# Altium PCB ZYNQ7020_AD9364_V2.PcbDoc (part 1 of 3)
Units mil, origin at the board's own origin, x right, y up, seen from the top; angles counter-clockwise.
Board outline 6000 x 4000 mil, 4 copper layers (Top Layer, Layer 1, Layer 2, Bottom Layer), stack 23.756 mil thick; 294 components, 275 nets, 1509 pads, 328 vias.
Unrouted connection lines stored in the file: 993.
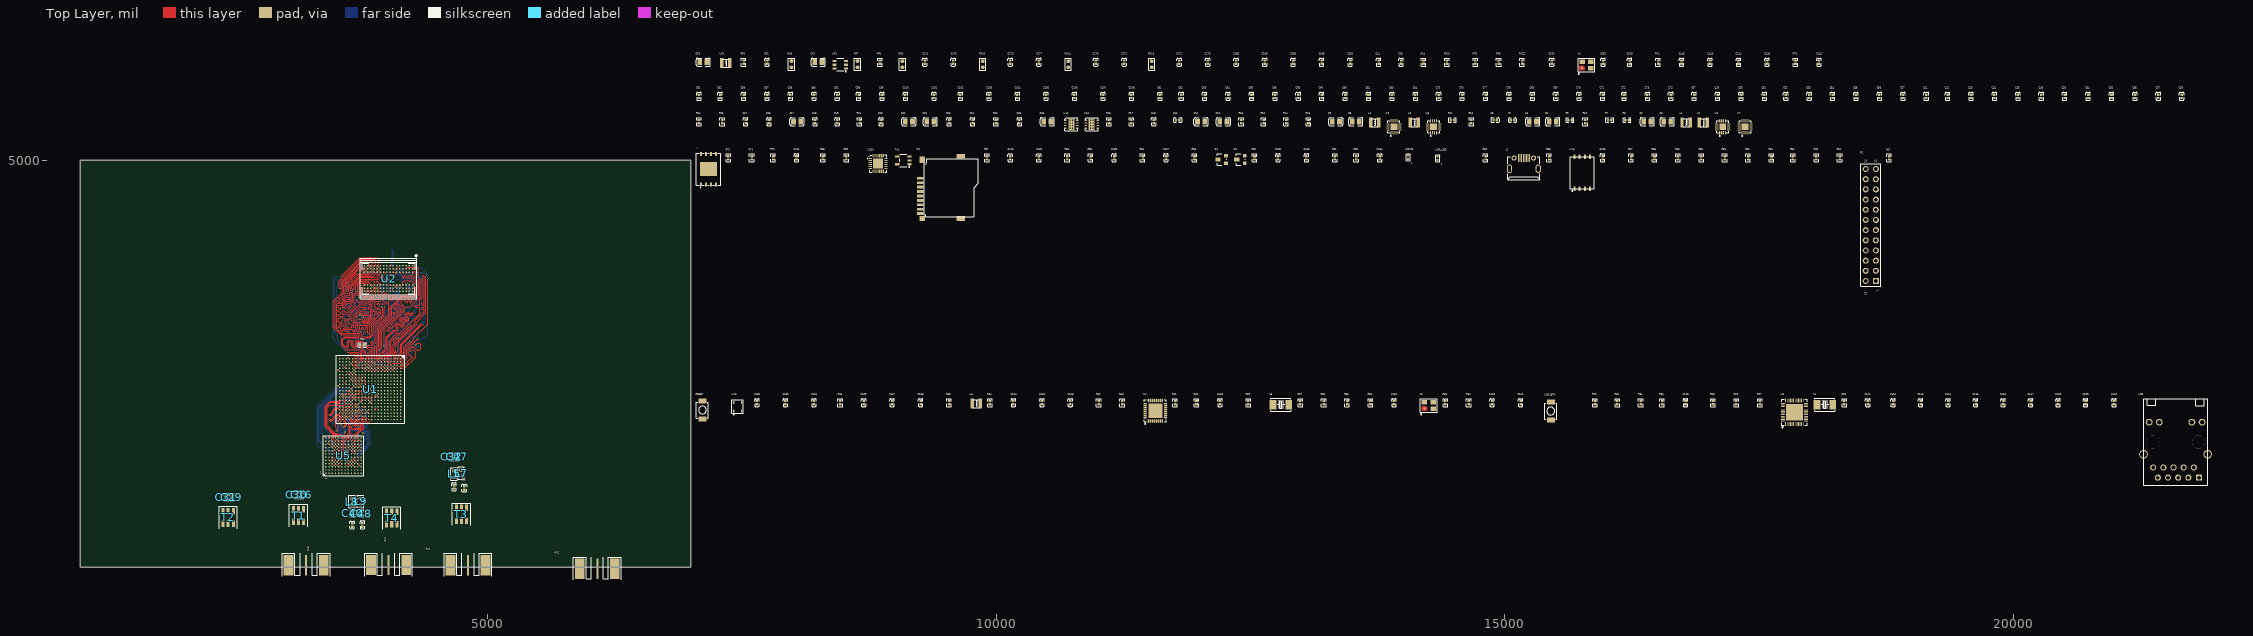
[diagram p0: Top Layer view]
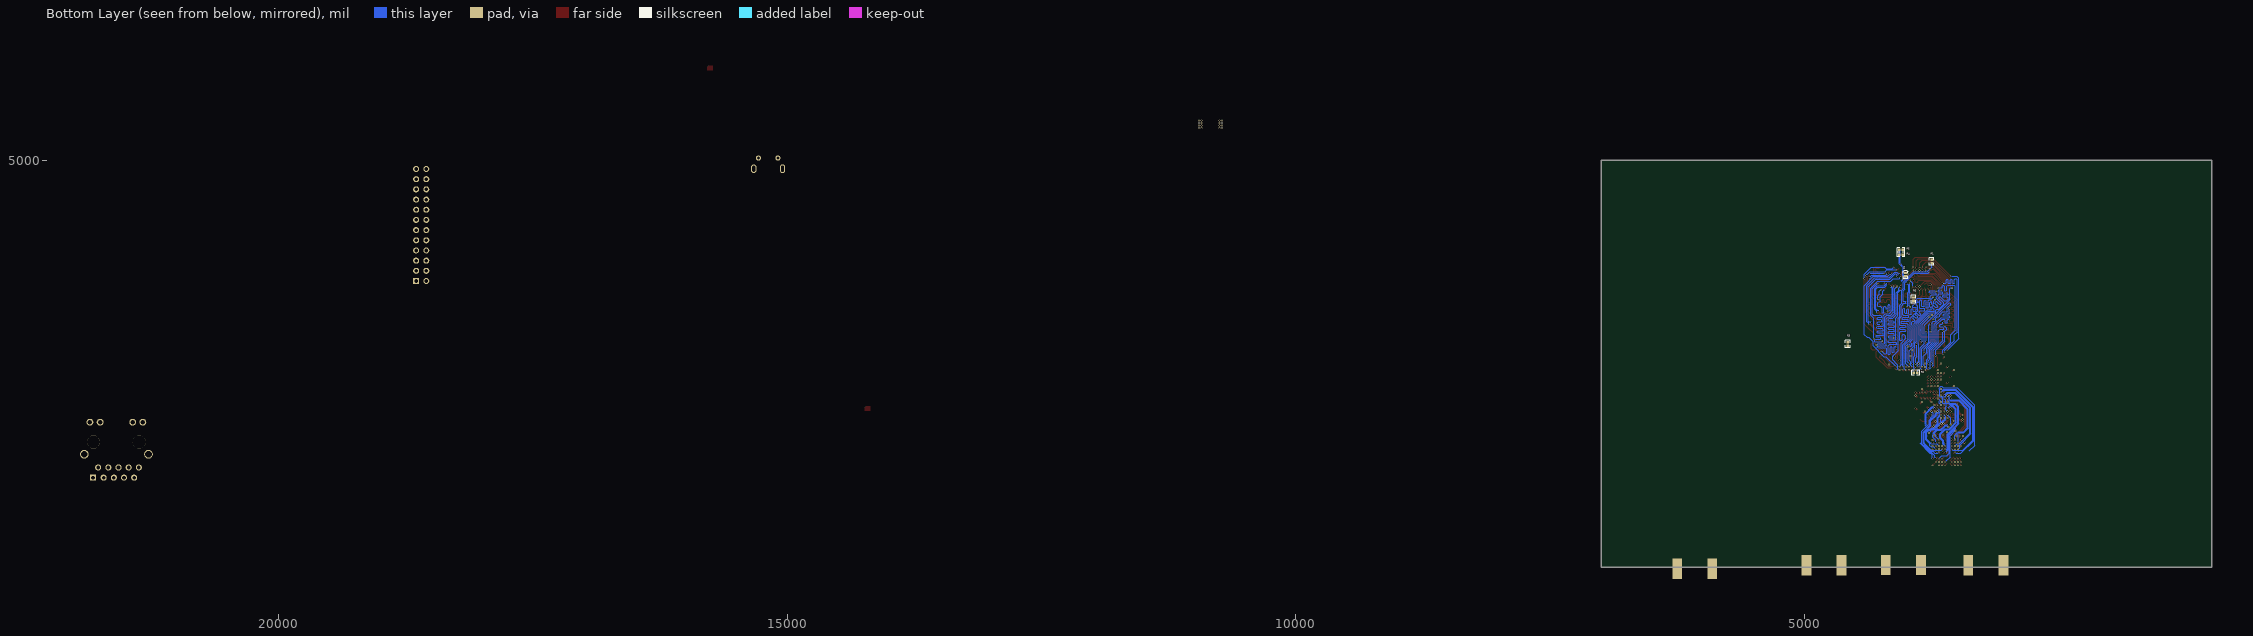
[diagram p1: Bottom Layer view, seen from below]
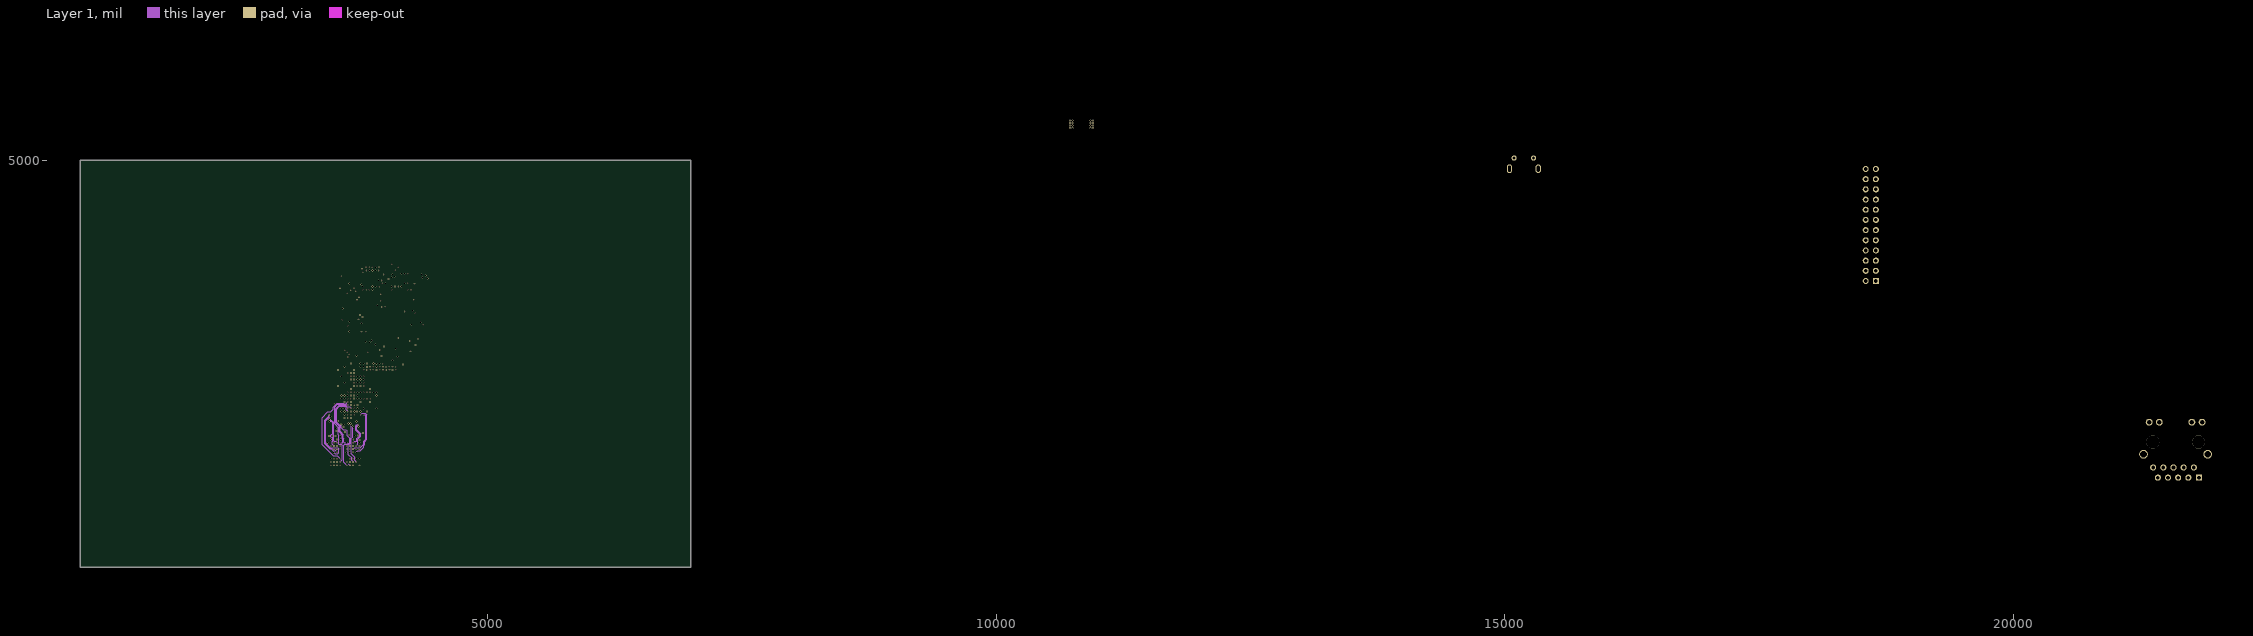
[diagram p2: Layer 1]

## Layer stack, top to bottom
Top Solder: solder mask 0.4, Solder Resist, Dk 3.5
Top Layer: signal copper 1.4
Dielectric 2: prepreg 2.8, PP-006, Dk 4.1
Layer 1: signal copper 1.378
Dielectric 1: dielectric 12.6, FR-4, Dk 4.8
Layer 2: signal copper 1.378
Dielectric 3: prepreg 2.8, PP-006, Dk 4.1
Bottom Layer: signal copper 1.4
Bottom Solder: solder mask 0.4, Solder Resist, Dk 3.5

## Board outline
1000,1000 7000,1000 7000,5000 1000,5000

## Design rules (kind name [scope] priority, off if disabled: settings)
Clearance [All] p1 off: gap=4 ignorepadtopadclearanceinfootprint=FALSE
Clearance Clearance_1 [All] p2: gap=4 ignorepadtopadclearanceinfootprint=FALSE
DiffPairsRouting [All] p1: maxlimit=100 minlimit=3 mostfreqgap=5 toplayer_minwidth=3 toplayer_maxwidth=100 toplayer_prefwidth=5 midlayer1_minwidth=3 midlayer1_maxwidth=100 midlayer1_prefwidth=5 midlayer2_minwidth=3 midlayer2_maxwidth=100 midlayer2_prefwidth=5 bottomlayer_minwidth=3 bottomlayer_maxwidth=100 bottomlayer_prefwidth=5 maxuncoupledlength=500
FabricationTestpoint [All] p1 off: side=3 testpointundercomponent=TRUE minsize=40 maxsize=100 preferedsize=60 minholesize=0 maxholesize=40 preferedholesize=32 testpointgrid=1 allowsidetop=TRUE allowsidebottom=TRUE usegrid=TRUE gridtolerance=0.01
PolygonConnect [All] p1: connectstyle=Relief reliefconductorwidth=30 reliefentries=4 polygonreliefangle="45 Angle" airgapwidth=10
RoutingLayers [All] p1: top layer_v5=TRUE mid layer 1_v5=FALSE mid layer 2_v5=FALSE bottom layer_v5=TRUE
RoutingVias [All] p1: holewidth=28 width=50 viastyle="Through Hole" minholewidth=1 minwidth=2 maxholewidth=500 maxwidth=500
SolderMaskExpansion [All] p1: expansion=4 istentingtop=FALSE
Width [All] p1: maxlimit=1000 minlimit=1 preferedwidth=10
27 further rules are at their usual default settings.

## Classes and differential pairs
net class DQ815: DDR3_DM1 DDR3_DQ8 DDR3_DQ9 DDR3_DQ10 DDR3_DQ11 DDR3_DQ12 DDR3_DQ13 DDR3_DQ14 DDR3_DQ15 DDR3_DQS1_N DDR3_DQS1_P
net class DQ07: DDR3_DM0 DDR3_DQ0 DDR3_DQ1 DDR3_DQ2 DDR3_DQ3 DDR3_DQ4 DDR3_DQ5 DDR3_DQ6 DDR3_DQ7 DDR3_DQS0_N DDR3_DQS0_P
net class ADDRES: DDR3_A0 DDR3_A1 DDR3_A2 DDR3_A3 DDR3_A4 DDR3_A5 DDR3_A6 DDR3_A7 DDR3_A8 DDR3_A9 DDR3_A10 DDR3_A11 DDR3_A12 DDR3_A13 DDR3_A14 DDR3_BA0 DDR3_BA1 DDR3_BA2 DDR3_CAS DDR3_CK_N DDR3_CK_P DDR3_CKE DDR3_CS DDR3_ODT DDR3_RAS DDR3_WE
component class "08 BALUN": C16 C29 C30 C31 C32 C40 C47 C48 C58 C59 C60 C63 L5 L7 L8 L9 RX1 RX2 T1 T2 T3 T4 TX1 TX2 U5
component class "07 AD9363": C14 C15 C142 C143 C144 C145 C146 C150 C151 C152 C162 C165 C166 C168 C169 C170 C171 C172 C173 C174 C175 C176 C177 CP1 CP2 CP3 LP1 R73 R74 R75 RP1 RP2 RX4 RX5 RX6 RX7 RX8 RX10 RX13 RX14 RX15 RX22 UP1 X4
component class "06 ZYNQ_POWER": C33 C34 C35 C36 C37 C38 C39 C41 C42 C43 C44 C45 C46 C49 C50 C51 C52 C53 C54 C55 C56 C57 C61 C62 C67 C68 C69 C70 C71 C72 C73 C74 C75 C76 C77 C78 C80 C81 C82 C83 C84 C85 C86 C87 C89 C90 C91 C92 C93 C94 C95 C96 C98 C99 C100 C101 C102 C103 C104 C105 C106 C107 C108
component class "05 POWER-SUPPLY": C2 C3 C4 C5 C6 C7 C8 C9 C10 C11 C12 C13 C17 C18 C19 C20 C21 C22 C23 C24 C25 C26 C27 C28 L1 L2 L3 L4 R7 R8 R9 R10 R11 R12 R13 R14 R15 R16 R17 R18 R21 R22 R24 R25 U6 U7 U8 U9 U11 U12
component class "04 ZYNQ_BANK0": * C133 C134 C135 C136 C137 C138 C139 C140 C141 DONE J2 P2 Q1 Q2 R47 R48 R49 R50 R51 R52 R53 R54 R55 R56 R57 R58 R59 R60 R61 R62 R63 R64 R65 R66 R67 R68 R69 R70 R71 R72 tf1 TU1 U14 USD1 USR_LED
component class "03 ZYNQ_PL-BANK34-35": U1
component class "02 ZYNQ_PS-BANK500-501": C109 C110 C111 C112 C113 C114 C115 C116 C117 C118 C119 C120 C121 C122 C123 C124 C125 C126 C127 C128 C129 C130 C131 C132 L6 LG1 R19 R26 R27 R28 R29 R30 R31 R32 R33 R34 R35 R36 R37 R38 R39 R40 R41 R42 R43 R44 R45 R46 RESET U3 U4 U13 USR_BTN X1 X2 X3
component class "01 ZYNQ_DDR": C1 R1 R2 R3 R4 R5 R6 R20 U2
differential pair USB_OTG: +USB_OTG_P -USB_OTG_N
differential pair TX_FRAME: +TX_FRAME_P -TX_FRAME_N
differential pair TX_D5: +TX_D5_P -TX_D5_N
differential pair TX_D4: +TX_D4_P -TX_D4_N
differential pair TX_D3: +TX_D3_P -TX_D3_N
differential pair TX_D2: +TX_D2_P -TX_D2_N
differential pair TX_D1: +TX_D1_P -TX_D1_N
differential pair TX_D0: +TX_D0_P -TX_D0_N
differential pair TX1B: +TX1B_P -TX1B_N
differential pair TX1BN: +TX1BN_P -TX1BN_N
differential pair TX1A: +TX1A_P -TX1A_N
differential pair RX_FRAME: +RX_FRAME_P -RX_FRAME_N
differential pair RX_D5: +RX_D5_P -RX_D5_N
differential pair RX_D4: +RX_D4_P -RX_D4_N
differential pair RX_D3: +RX_D3_P -RX_D3_N
differential pair RX_D2: +RX_D2_P -RX_D2_N
differential pair RX_D1: +RX_D1_P -RX_D1_N
differential pair RX_D0: +RX_D0_P -RX_D0_N
differential pair RX1B: +RX1B_P -RX1B_N
differential pair RX1BN: +RX1BN_P -RX1BN_N
differential pair RX1A: +RX1A_P -RX1A_N
differential pair RX1AN: +RX1AN_P -RX1AN_N
differential pair PHY_MDI3: +PHY_MDI3_P -PHY_MDI3_N
differential pair PHY_MDI2: +PHY_MDI2_P -PHY_MDI2_N
differential pair PHY_MDI1: +PHY_MDI1_P -PHY_MDI1_N
differential pair PHY_MDI0: +PHY_MDI0_P -PHY_MDI0_N
differential pair FB_CLK: +FB_CLK_P -FB_CLK_N
differential pair DDR3_DQS1: +DDR3_DQS1_P -DDR3_DQS1_N
differential pair DDR3_DQS0: +DDR3_DQS0_P -DDR3_DQS0_N
differential pair DDR3_CK: +DDR3_CK_P -DDR3_CK_N
differential pair DATA_CLK: +DATA_CLK_P -DATA_CLK_N

## Components (designator, comment, footprint, x,y, rotation, side; value= is the part's Value field where it differs from the comment)
* "W25Q128" W25Q256 7175,4915 r0 top
C1 "104" LC-0402_C 4011,3877 r90 bottom
C2 "10μF" LC-0805_C 16400,5380 r0 top
C3 "10μF" LC-0805_C 16595,5380 r0 top
C4 "10μF" LC-0805_C 15275,5380 r0 top
C5 "10μF" LC-0805_C 15470,5380 r0 top
C6 "0.1μF" LC-0402_C 14905,5395 r0 top
C7 "0.1μF" LC-0402_C 15075,5395 r0 top
C8 "10μF" LC-0805_C 13535,5380 r0 top
C9 "10μF" LC-0805_C 13340,5380 r0 top
C10 "10μF" LC-0805_C 12235,5380 r0 top
C11 "0.1μF" LC-0402_C 11785,5395 r0 top
C12 "10μF" LC-0805_C 12015,5380 r0 top
C13 "0.1μF" LC-0402_C 11550,5380 r90 top
C14 "1μ" LC-0402_C 13760,5965 r90 top
C15 "0.001μ" LC-0402_C 13980,5965 r90 top
C16 "18p" LC-0402_C 3177,1712.94 r90 top
C17 "2.2μF" LC-0805_C 8045,5380 r0 top
C18 "0.1μF" LC-0402_C 8220,5380 r90 top
C19 "3.3nF" LC-0402_C 8440,5380 r90 top
C20 "2.2μF" LC-0402_C 8870,5380 r90 top
C21 "0.1μF" LC-0805_C 9145,5380 r0 top
C22 "2.2μF" LC-0805_C 9355,5380 r0 top
C23 "0.1μF" LC-0402_C 9540,5380 r90 top
C24 "3.3nF" LC-0402_C 9770,5380 r90 top
C25 "2.2μF" LC-0402_C 10230,5380 r90 top
C26 "0.1μF" LC-0805_C 10505,5380 r0 top
C27 "0.1μF" LC-0402_C 7540,5380 r90 top
C28 "0.1μF" LC-0402_C 7770,5380 r90 top
C29 "18p" LC-0402_C 2493,1688 r90 top
C30 "18p" LC-0402_C 3131,1713.47 r90 top
C31 "18p" LC-0402_C 2438,1689 r90 top
C32 "18p" LC-0402_C 4653,2087 r270 top
C33 "10μF" LC-0402_C 20500,5630 r90 top
C34 "10μF" LC-0402_C 20730,5630 r90 top
C35 "10μF" LC-0402_C 20960,5630 r90 top
C36 "10μF" LC-0402_C 21190,5630 r90 top
C37 "10μF" LC-0402_C 21420,5630 r90 top
C38 "10μF" LC-0402_C 7980,5630 r90 top
C39 "10μF" LC-0402_C 21650,5630 r90 top
C40 "18p" LC-0402_C 3678,1531 r270 top
C41 "10μF" LC-0402_C 19140,5630 r90 top
C42 "10μF" LC-0402_C 19350,5630 r90 top
C43 "10μF" LC-0402_C 19580,5630 r90 top
C44 "10μF" LC-0402_C 19810,5630 r90 top
C45 "10μF" LC-0402_C 20040,5630 r90 top
C46 "10μF" LC-0402_C 20270,5630 r90 top
C47 "18p" LC-0402_C 4707,2089 r270 top
C48 "18p" LC-0402_C 3764,1530 r270 top
C49 "10μF" LC-0402_C 17090,5630 r90 top
C50 "10μF" LC-0402_C 17320,5630 r90 top
C51 "10μF" LC-0402_C 17550,5630 r90 top
C52 "10μF" LC-0402_C 17760,5630 r90 top
C53 "10μF" LC-0402_C 17990,5630 r90 top
C54 "10μF" LC-0402_C 18220,5630 r90 top
C55 "10μF" LC-0402_C 18450,5630 r90 top
C56 "10μF" LC-0402_C 18680,5630 r90 top
C57 "10μF" LC-0402_C 18910,5630 r90 top
C58 "10μ" LC-0402_C 4675,1792.73 r90 top
C59 "0.001μ" LC-0402_C 4775,1780.73 r270 top
C60 "10μ" LC-0402_C 3674,1417.73 r270 top
C61 "10μF" LC-0402_C 7080,5630 r90 top
C62 "10μF" LC-0402_C 7290,5630 r90 top
C63 "0.001μ" LC-0402_C 3775,1418.73 r90 top
C67 "10μF" LC-0402_C 16860,5630 r90 top
C68 "10μF" LC-0402_C 15270,5630 r90 top
C69 "10μF" LC-0402_C 15500,5630 r90 top
C70 "10μF" LC-0402_C 15730,5630 r90 top
C71 "10μF" LC-0402_C 15960,5630 r90 top
C72 "10μF" LC-0402_C 16170,5630 r90 top
C73 "10μF" LC-0402_C 16400,5630 r90 top
C74 "10μF" LC-0402_C 16630,5630 r90 top
C75 "10μF" LC-0402_C 14350,5630 r90 top
C76 "10μF" LC-0402_C 14580,5630 r90 top
C77 "10μF" LC-0402_C 14810,5630 r90 top
C78 "10μF" LC-0402_C 15040,5630 r90 top
C80 "10μF" LC-0402_C 13430,5630 r90 top
C81 "10μF" LC-0402_C 8440,5630 r90 top
C82 "10μF" LC-0402_C 13660,5630 r90 top
C83 "10μF" LC-0402_C 13890,5630 r90 top
C84 "10μF" LC-0402_C 14120,5630 r90 top
C85 "10μF" LC-0402_C 12970,5630 r90 top
C86 "10μF" LC-0402_C 8210,5630 r90 top
C87 "10μF" LC-0402_C 7750,5630 r90 top
C89 "10μF" LC-0402_C 7520,5630 r90 top
C90 "10μF" LC-0402_C 13200,5630 r90 top
C91 "10μF" LC-0402_C 11610,5630 r90 top
C92 "10μF" LC-0402_C 11820,5630 r90 top
C93 "10μF" LC-0402_C 12050,5630 r90 top
C94 "10μF" LC-0402_C 12280,5630 r90 top
C95 "10μF" LC-0402_C 12510,5630 r90 top
C96 "10μF" LC-0402_C 12740,5630 r90 top
C98 "10μF" LC-0402_C 8650,5630 r90 top
C99 "10μF" LC-0402_C 8880,5630 r90 top
C100 "10μF" LC-0402_C 9110,5630 r90 top
C101 "10μF" LC-0402_C 9390,5630 r90 top
C102 "10μF" LC-0402_C 9650,5630 r90 top
C103 "10μF" LC-0402_C 9930,5630 r90 top
C104 "10μF" LC-0402_C 10210,5630 r90 top
C105 "10μF" LC-0402_C 10490,5630 r90 top
C106 "10μF" LC-0402_C 10770,5630 r90 top
C107 "10μF" LC-0402_C 11050,5630 r90 top
C108 "10μF" LC-0402_C 11330,5630 r90 top
C109 "1μ" LC-0402_C 20705,2620 r90 top
C110 "1μ" LC-0402_C 20985,2620 r90 top
C111 "1μ" LC-0402_C 18565,2620 r90 top
C112 "0.1μ" LC-0402_C 18815,2620 r90 top
C113 "1μ" LC-0402_C 19085,2620 r90 top
C114 "1μ" LC-0402_C 19355,2620 r90 top
C115 "1μ" LC-0402_C 19625,2620 r90 top
C116 "1μ" LC-0402_C 19895,2620 r90 top
C117 "18p" LC-0402_C 20165,2620 r90 top
C118 "18p" LC-0402_C 20435,2620 r90 top
C119 "0.01μ" LC-0402_C 16775,2620 r90 top
C120 "0.1μ" LC-0402_C 14875,2620 r90 top
C121 "10μ" LC-0402_C 15155,2620 r90 top
C122 "18p" LC-0402_C 13910,2620 r90 top
C123 "18p" LC-0402_C 12200,2620 r90 top
C124 "1μ" LC-0402_C 10170,2620 r90 top
C125 "1μ" LC-0402_C 10450,2620 r90 top
C126 "1μ" LC-0402_C 10730,2620 r90 top
C127 "1μ" LC-0402_C 8980,2620 r90 top
C128 "1μ" LC-0402_C 9260,2620 r90 top
C129 "4.7μ" LC-0402_C 8700,2620 r90 top
C130 "1μ" LC-0402_C 7930,2620 r90 top
C131 "1μ" LC-0402_C 8210,2620 r90 top
C132 "0.1μ" LC-0402_C 7650,2620 r90 top
C133 "0.1μ" LC-0402_C 15960,5025 r90 top
C134 "0.1μ" LC-0402_C 13770,5025 r90 top
C135 "4.7μ" LC-0402_C 12770,5025 r90 top
C136 "4.7μ" LC-0402_C 13050,5025 r90 top
C137 "4.7μ" LC-0402_C 11670,5025 r90 top
C138 "0.1μ" LC-0402_C 11160,5025 r90 top
C139 "10μ" LC-0402_C 10420,5025 r90 top
C140 "0.1μ" LC-0402_C 10140,5025 r90 top
C141 "0.1μ" LC-0402_C 8040,5025 r90 top
C142 "1μ" LC-0402_C 18085,5965 r90 top
C143 "0.1μ" LC-0402_C 17015,5965 r90 top
C144 "10μ" LC-0402_C 17295,5965 r90 top
C145 "1μ" LC-0402_C 17575,5965 r90 top
C146 "0.001μ" LC-0402_C 16735,5965 r90 top
C150 "18p" LC-0402_C 16225,5965 r90 top
C151 "0.001μ" LC-0402_C 15965,5965 r90 top
C152 "18p" LC-0402_C 15460,5965 r90 top
C162 "10μ" LC-0402_C 13480,5965 r90 top
C165 "10μ" LC-0402_C 12920,5965 r90 top
C166 "1μ" LC-0402_C 13200,5965 r90 top
C168 "1μ" LC-0402_C 12360,5965 r90 top
C169 "0.001μ" LC-0402_C 12640,5965 r90 top
C170 "1μ" LC-0402_C 10980,5965 r90 top
C171 "0.001μ" LC-0402_C 11260,5965 r90 top
C172 "1μ" LC-0402_C 11800,5965 r90 top
C173 "0.001μ" LC-0402_C 12080,5965 r90 top
C174 "1μ" LC-0402_C 9300,5965 r90 top
C175 "0.001μ" LC-0402_C 9580,5965 r90 top
C176 "1μ" LC-0402_C 10140,5965 r90 top
C177 "0.001μ" LC-0402_C 10420,5965 r90 top
CP1 "22uF" LC-0805_C 8255,5965 r0 top
CP2 "22pF" LC-0402_C 7750,5965 r90 top
CP3 "22uF" LC-0805_C 7125,5965 r0 top
DONE "LED" D0402 14050,5030 r90 top
J2 "microusb" "micro usb" 15090,5020 r0 top
L1 "2.2uH" L1008 16780,5370 r0 top
L2 "2.2uH" L1008 16950,5370 r0 top
L3 "2.2uH" L1008 14110,5370 r0 top
L4 "2.2uH" L1008 13720,5370 r0 top
L5 "330nh" LC-0603_L 4676,1919 r270 top
L6 "2.2uH" L1008 9805,2610 r0 top
L7 "330nh" LC-0603_L 4745,1928 r270 top
L8 "330nh" LC-0603_L 3672,1647 r90 top
L9 "330nh" LC-0603_L 3757,1649 r90 top
LG1 "HR911130C" HR911130C 21590,2155 r0 top
LP1 "4.7uH" L1008 7345,5955 r0 top
P2 "Header 12X2A" HDR2X12_CEN 18645,3815 r90 top
Q1 "AO3400" NMOS 12180,5010 r0 top
Q2 "AO3400" NMOS 12365,5010 r0 top
R1 "4.7K" LC-0402_R 3754,4007.27 r90 bottom
R2 "82R" LC-0402_R 3911.73,2913 r0 bottom
R3 "82R" LC-0402_R 4579,3196 r90 bottom
R4 "4.7K" LC-0402_R 4054.73,4074 r180 bottom
R5 "4.7K" LC-0402_R 4055,4120 r0 bottom
R6 "240R" LC-0402_R 3932.68,3635.86 r90 bottom
R7 "100K" LC-0402_R 16030,5395 r0 top
R8 "10K" LC-0402_R 16200,5395 r0 top
R9 "4.99K" LC-0402_R 15640,5395 r0 top
R10 "18.7K" LC-0402_R 15790,5380 r90 top
R11 "20K" LC-0402_R 14485,5395 r0 top
R12 "15K" LC-0402_R 14670,5380 r90 top
R13 "10K" LC-0402_R 13070,5380 r90 top
R14 "13K" LC-0402_R 12850,5380 r90 top
R15 "10K" LC-0402_R 12630,5380 r90 top
R16 "56.2K" LC-0402_R 12410,5380 r90 top
R17 "15K" LC-0402_R 11330,5380 r90 top
R18 "18K" LC-0402_R 11110,5380 r90 top
R19 "10K" LC-0402_R 15885,2620 r90 top
R20 "80.6R" LC-0402_R 3772,3186 r180 top
R21 "6.25K" LC-0402_R 8660,5380 r90 top
R22 "6.25K" LC-0402_R 10000,5380 r90 top
R24 "10K" LC-0402_R 7080,5380 r90 top
R25 "10K" LC-0402_R 7310,5380 r90 top
R26 "2.49K" LC-0402_R 18335,2620 r90 top
R27 "4.7K" LC-0402_R 17505,2620 r90 top
R28 "33R" LC-0402_R 17045,2620 r90 top
R29 "33R" LC-0402_R 17275,2620 r90 top
R30 "10K" LC-0402_R 16545,2620 r90 top
R31 "330R" LC-0402_R 16335,2620 r90 top
R32 "330R" LC-0402_R 16105,2620 r90 top
R33 "1.5K" LC-0402_R 14415,2620 r90 top
R34 "1.5K" LC-0402_R 14645,2620 r90 top
R35 "4.7K" LC-0402_R 13680,2620 r90 top
R36 "4.7K" LC-0402_R 13450,2620 r90 top
R37 "33R" LC-0402_R 12990,2620 r90 top
R38 "4.7K" LC-0402_R 13220,2620 r90 top
R39 "4.7K" LC-0402_R 12480,2620 r90 top
R40 "4.7K" LC-0402_R 11970,2620 r90 top
R41 "4.7K" LC-0402_R 11760,2620 r90 top
R42 "33R" LC-0402_R 11010,2620 r90 top
R43 "4.7K" LC-0402_R 11240,2620 r90 top
R44 "8.06K" LC-0402_R 9940,2620 r90 top
R45 "4.7K" LC-0402_R 9540,2620 r90 top
R46 "4.7K" LC-0402_R 8470,2620 r90 top
R47 "20K" LC-0402_R 18775,5025 r90 top
R48 "1K" LC-0402_R 16700,5025 r90 top
R49 "20K" LC-0402_R 18060,5025 r90 top
R50 "20K" LC-0402_R 17390,5025 r90 top
R51 "20K" LC-0402_R 17620,5025 r90 top
R52 "20K" LC-0402_R 17830,5025 r90 top
R53 "20K" LC-0402_R 17160,5025 r90 top
R54 "10K" LC-0402_R 18290,5025 r90 top
R55 "4.7K" LC-0402_R 16930,5025 r90 top
R56 "20K" LC-0402_R 16470,5025 r90 top
R57 "4.7K" LC-0402_R 16240,5025 r90 top
R58 "33R" LC-0402_R 15435,5025 r90 top
R59 "470R" LC-0402_R 14810,5025 r90 top
R60 "470R" LC-0402_R 13540,5025 r90 top
R61 "470R" LC-0402_R 13330,5025 r90 top
R62 "4.7K" LC-0402_R 12540,5025 r90 top
R63 "4.7K" LC-0402_R 11950,5025 r90 top
R64 "0R" LC-0402_R 11440,5025 r90 top
R65 "10K" LC-0402_R 10930,5025 r90 top
R66 "1K" LC-0402_R 10700,5025 r90 top
R67 "0R" LC-0402_R 9910,5025 r90 top
R68 "100K" LC-0402_R 8300,5025 r90 top
R69 "10K" LC-0402_R 8530,5025 r90 top
R70 "330R" LC-0402_R 7810,5025 r90 top
R71 "10K" LC-0402_R 7600,5025 r90 top
R72 "40.2R" LC-0402_R 7370,5025 r90 top
R73 "1R" LC-0402_R 17855,5965 r90 top
R74 "1R" LC-0402_R 16505,5965 r90 top
R75 "14.3K" LC-0402_R 14710,5965 r90 top
RESET "SW-PB" 开关 7115,2550 r90 top
RP1 "10K" LC-0402_R 8860,5965 r90 top
RP2 "20K" LC-0402_R 7520,5965 r90 top
RX1 "JCCEM001" CNSMARAL687W375H171 3221.5,1025.5 r270 top
RX2 "JCCEM001" CNSMARAL687W375H171 6082.5,990.5 r270 top
RX4 "0R" LC-0402_R 14200,5965 r90 top
RX5 "0R" LC-0402_R 14940,5965 r90 top
RX6 "0R" LC-0603_L 9080,5945 r90 top
RX7 "0R" LC-0603_L 8640,5945 r90 top
RX8 "0R" LC-0603_L 7990,5945 r90 top
RX10 "0R" LC-0402_R 14430,5965 r90 top
RX13 "0R" LC-0603_L 11530,5945 r90 top
RX14 "0R" LC-0603_L 10710,5945 r90 top
RX15 "0R" LC-0603_L 9870,5945 r90 top
RX22 "0R" LC-0402_R 15170,5965 r90 top
T1 "TCM1-63AX+" TSML150W160H160 3148,1510.51 r180 top
T2 "TCM1-63AX+" TSML150W160H160 2456,1491.51 r180 top
T3 "TCM1-63AX+" TSML150W160H160 4747,1523 r180 top
T4 "TCM1-63AX+" TSML150W160H160 4063,1486 r180 top
tf1 "TF-SD" TF 9455,4735 r0 top
TU1 "TPS2051BDBVR" TPS2051BDBVR 9105,5000 r0 top
TX1 "JCCEM001" CNSMARAL687W375H171 4812,1025 r270 top
TX2 "JCCEM001" CNSMARAL687W375H171 4031.5,1027.5 r270 top
U1 "XC7Z010-CLG400" CLG400-0.8 3850.78,2752.77 r270 top locked
U2 "MT41J64M16JT-187EG" FBGA96 4303.12,4063.57 r270 top locked
U3 "RTL8211E-VB-CG" LC-QFN-48_6x6x04P 17845,2525 r0 top
U4 "USB3320C" LC-QFN-32_5x5x05P 11565,2540 r0 top
U5 "AD9363" AD936X 3580.03,2063.55 r90 top locked
U6 "TLV62130" TLV62130RGT 17140,5330 r0 top
U7 "TLV62130" TLV62130RGT 17360,5330 r0 top
U8 "TLV62130" TLV62130RGT 14300,5330 r0 top
U9 "TLV62130" TLV62130RGT 13910,5330 r0 top
U11 "TPS7A8101" TPS7A8101 10740,5355 r0 top
U12 "TPS7A8101" TPS7A8101 10940,5355 r0 top
U13 "TCM811TE" TCM811TERCTR 7460,2580 r0 top
U14 "S25FL256SAGNFI00" MLP8 15760,4860 r90 top
UP1 "AP3419" AP3419 8475,5940 r0 top
USD1 "TXS02612RTWR" TXS02612RTWR 8845,4965 r0 top
USR_BTN "SW-PB" 开关 15450,2540 r90 top
USR_LED "LED" D0402 14340,5020 r90 top
X1 "25M" LC-SMD-5032_2P 18145,2600 r0 top
X2 "33.333MHz" OSC-SMD_4P-L3.2-W2.5-BL 14305,2615 r0 top
X3 "24M" LC-SMD-5032_2P 12800,2600 r0 top
X4 "40MHz" OSC-SMD_4P-L3.2-W2.5-BL 15855,5960 r0 top

## Footprints (in the part's own frame and the unit in brackets; to place one, negate y for a bottom-side part, rotate by r counter-clockwise, add the part's x,y. Pads: shape width x height; smd on the part's side, far side on the other; paste and mask are expansions set on the pad)
AD936X [mil]
  round 14 smd: A1(-137.01,164.51) A2(-105.51,164.51) A3(-74.02,164.51) A4(-42.52,164.51) A5(-11.02,164.51) A6(20.47,164.51) A7(51.97,164.51) A8(83.46,164.51) A9(114.96,164.51) A10(146.46,164.51) A11(177.95,164.51) A12(209.45,164.51) B1(-137.01,133.01) B2(-105.51,133.01) B3(-74.02,133.01) B4(-42.52,133.01) B5(-11.02,133.01) B6(20.47,133.01) B7(51.97,133.01) B8(83.46,133.01) B9(114.96,133.01) B10(146.46,133.01) B11(177.95,133.01) B12(209.45,133.01) C1(-137.01,101.52) C2(-105.51,101.52) C3(-74.02,101.52) C4(-42.52,101.52) C5(-11.02,101.52) C6(20.47,101.52) C7(51.97,101.52) C8(83.46,101.52) C9(114.96,101.52) C10(146.46,101.52) C11(177.95,101.52) C12(209.45,101.52) D1(-137.01,70.02) D2(-105.51,70.02) D3(-74.02,70.02) D4(-42.52,70.02) D5(-11.02,70.02) D6(20.47,70.02) D7(51.97,70.02) D8(83.46,70.02) D9(114.96,70.02) D10(146.46,70.02) D11(177.95,70.02) D12(209.45,70.02) E1(-137.01,38.52) E2(-105.51,38.52) E3(-74.02,38.52) E4(-42.52,38.52) E5(-11.02,38.52) E6(20.47,38.52) E7(51.97,38.52) E8(83.46,38.52) E9(114.96,38.52) E10(146.46,38.52) E11(177.95,38.52) E12(209.45,38.52) F1(-137.01,7.03) F2(-105.51,7.03) F3(-74.02,7.03) F4(-42.52,7.03) F5(-11.02,7.03) F6(20.47,7.03) F7(51.97,7.03) F8(83.46,7.03) F9(114.96,7.03) F10(146.46,7.03) F11(177.95,7.03) F12(209.45,7.03) G1(-137.01,-24.47) G2(-105.51,-24.47) G3(-74.02,-24.47) G4(-42.52,-24.47) G5(-11.02,-24.47) G6(20.47,-24.47) G7(51.97,-24.47) G8(83.46,-24.47) G9(114.96,-24.47) G10(146.46,-24.47) G11(177.95,-24.47) G12(209.45,-24.47) H1(-137.01,-55.96) H2(-105.51,-55.96) H3(-74.02,-55.96) H4(-42.52,-55.96) H5(-11.02,-55.96) H6(20.47,-55.96) H7(51.97,-55.96) H8(83.46,-55.96) H9(114.96,-55.96) H10(146.46,-55.96) H11(177.95,-55.96) H12(209.45,-55.96) J1(-137.01,-87.46) J2(-105.51,-87.46) J3(-74.02,-87.46) J4(-42.52,-87.46) J5(-11.02,-87.46) J6(20.47,-87.46) J7(51.97,-87.46) J8(83.46,-87.46) J9(114.96,-87.46) J10(146.46,-87.46) J11(177.95,-87.46) J12(209.45,-87.46) K1(-137.01,-118.96) K2(-105.51,-118.96) K3(-74.02,-118.96) K4(-42.52,-118.96) K5(-11.02,-118.96) K6(20.47,-118.96) K7(51.97,-118.96) K8(83.46,-118.96) K9(114.96,-118.96) K10(146.46,-118.96) K11(177.95,-118.96) K12(209.45,-118.96) L1(-137.01,-150.45) L2(-105.51,-150.45) L3(-74.02,-150.45) L4(-42.52,-150.45) L5(-11.02,-150.45) L6(20.47,-150.45) L7(51.97,-150.45) L8(83.46,-150.45) L9(114.96,-150.45) L10(146.46,-150.45) L11(177.95,-150.45) L12(209.45,-150.45) M1(-137.01,-181.95) M2(-105.51,-181.95) M3(-74.02,-181.95) M4(-42.52,-181.95) M5(-11.02,-181.95) M6(20.47,-181.95) M7(51.97,-181.95) M8(83.46,-181.95) M9(114.96,-181.95) M10(146.46,-181.95) M11(177.95,-181.95) M12(209.45,-181.95)
  silkscreen extent -161,-206 233,188
AP3419 [mm]
  rect 1x0.55 smd: 1(1.268,-0.95) 2(1.268,0) 3(1.268,0.95) 4(-1.532,0.95) 5(-1.532,0) 6(-1.532,-0.95)
  silkscreen extent -1.03,-1.78 1.39,1.55
CLG400-0.8 [mm]
  round 0.35 smd: A1(-7.6,7.6) A2(-6.8,7.6) A3(-6,7.6) A4(-5.2,7.6) A5(-4.4,7.6) A6(-3.6,7.6) A7(-2.8,7.6) A8(-2,7.6) A9(-1.2,7.6) A10(-0.4,7.6) A11(0.4,7.6) A12(1.2,7.6) A13(2,7.6) A14(2.8,7.6) A15(3.6,7.6) A16(4.4,7.6) A17(5.2,7.6) A18(6,7.6) A19(6.8,7.6) A20(7.6,7.6) B1(-7.6,6.8) B2(-6.8,6.8) B3(-6,6.8) B4(-5.2,6.8) B5(-4.4,6.8) B6(-3.6,6.8) B7(-2.8,6.8) B8(-2,6.8) B9(-1.2,6.8) B10(-0.4,6.8) B11(0.4,6.8) B12(1.2,6.8) B13(2,6.8) B14(2.8,6.8) B15(3.6,6.8) B16(4.4,6.8) B17(5.2,6.8) B18(6,6.8) B19(6.8,6.8) B20(7.6,6.8) C1(-7.6,6) C2(-6.8,6) C3(-6,6) C4(-5.2,6) C5(-4.4,6) C6(-3.6,6) C7(-2.8,6) C8(-2,6) C9(-1.2,6) C10(-0.4,6) C11(0.4,6) C12(1.2,6) C13(2,6) C14(2.8,6) C15(3.6,6) C16(4.4,6) C17(5.2,6) C18(6,6) C19(6.8,6) C20(7.6,6) D1(-7.6,5.2) D2(-6.8,5.2) D3(-6,5.2) D4(-5.2,5.2) D5(-4.4,5.2) D6(-3.6,5.2) D7(-2.8,5.2) D8(-2,5.2) D9(-1.2,5.2) D10(-0.4,5.2) D11(0.4,5.2) D12(1.2,5.2) D13(2,5.2) D14(2.8,5.2) D15(3.6,5.2) D16(4.4,5.2) D17(5.2,5.2) D18(6,5.2) D19(6.8,5.2) D20(7.6,5.2) E1(-7.6,4.4) E2(-6.8,4.4) E3(-6,4.4) E4(-5.2,4.4) E5(-4.4,4.4) E6(-3.6,4.4) E7(-2.8,4.4) E8(-2,4.4) E9(-1.2,4.4) E10(-0.4,4.4) E11(0.4,4.4) E12(1.2,4.4) E13(2,4.4) E14(2.8,4.4) E15(3.6,4.4) E16(4.4,4.4) E17(5.2,4.4) E18(6,4.4) E19(6.8,4.4) E20(7.6,4.4) F1(-7.6,3.6) F2(-6.8,3.6) F3(-6,3.6) F4(-5.2,3.6) F5(-4.4,3.6) F6(-3.6,3.6) F7(-2.8,3.6) F8(-2,3.6) F9(-1.2,3.6) F10(-0.4,3.6) F11(0.4,3.6) F12(1.2,3.6) F13(2,3.6) F14(2.8,3.6) F15(3.6,3.6) F16(4.4,3.6) F17(5.2,3.6) F18(6,3.6) F19(6.8,3.6) F20(7.6,3.6) G1(-7.6,2.8) G2(-6.8,2.8) G3(-6,2.8) G4(-5.2,2.8) G5(-4.4,2.8) G6(-3.6,2.8) G7(-2.8,2.8) G8(-2,2.8) G9(-1.2,2.8) G10(-0.4,2.8) G11(0.4,2.8) G12(1.2,2.8) G13(2,2.8) G14(2.8,2.8) G15(3.6,2.8) G16(4.4,2.8) G17(5.2,2.8) G18(6,2.8) G19(6.8,2.8) G20(7.6,2.8) H1(-7.6,2) H2(-6.8,2) H3(-6,2) H4(-5.2,2) H5(-4.4,2) H6(-3.6,2) H7(-2.8,2) H8(-2,2) H9(-1.2,2) H10(-0.4,2) H11(0.4,2) H12(1.2,2) H13(2,2) H14(2.8,2) H15(3.6,2) H16(4.4,2) H17(5.2,2) H18(6,2) H19(6.8,2) H20(7.6,2) J1(-7.6,1.2) J2(-6.8,1.2) J3(-6,1.2) J4(-5.2,1.2) J5(-4.4,1.2) J6(-3.6,1.2) J7(-2.8,1.2) J8(-2,1.2) J9(-1.2,1.2) J10(-0.4,1.2) J11(0.4,1.2) J12(1.2,1.2) J13(2,1.2) J14(2.8,1.2) J15(3.6,1.2) J16(4.4,1.2) J17(5.2,1.2) J18(6,1.2) J19(6.8,1.2) J20(7.6,1.2) K1(-7.6,0.4) K2(-6.8,0.4) K3(-6,0.4) K4(-5.2,0.4) K5(-4.4,0.4) K6(-3.6,0.4) K7(-2.8,0.4) K8(-2,0.4) K9(-1.2,0.4) K10(-0.4,0.4) K11(0.4,0.4) K12(1.2,0.4) K13(2,0.4) K14(2.8,0.4) K15(3.6,0.4) K16(4.4,0.4) K17(5.2,0.4) K18(6,0.4) K19(6.8,0.4) K20(7.6,0.4) L1(-7.6,-0.4) L2(-6.8,-0.4) L3(-6,-0.4) L4(-5.2,-0.4) L5(-4.4,-0.4) L6(-3.6,-0.4) L7(-2.8,-0.4) L8(-2,-0.4) L9(-1.2,-0.4) L10(-0.4,-0.4) L11(0.4,-0.4) L12(1.2,-0.4) L13(2,-0.4) L14(2.8,-0.4) L15(3.6,-0.4) L16(4.4,-0.4) L17(5.2,-0.4) L18(6,-0.4) L19(6.8,-0.4) L20(7.6,-0.4) M1(-7.6,-1.2) M2(-6.8,-1.2) M3(-6,-1.2) M4(-5.2,-1.2) M5(-4.4,-1.2) M6(-3.6,-1.2) M7(-2.8,-1.2) M8(-2,-1.2) M9(-1.2,-1.2) M10(-0.4,-1.2) M11(0.4,-1.2) M12(1.2,-1.2) M13(2,-1.2) M14(2.8,-1.2) M15(3.6,-1.2) M16(4.4,-1.2) M17(5.2,-1.2) M18(6,-1.2) M19(6.8,-1.2) M20(7.6,-1.2) N1(-7.6,-2) N2(-6.8,-2) N3(-6,-2) N4(-5.2,-2) N5(-4.4,-2) N6(-3.6,-2) N7(-2.8,-2) N8(-2,-2) N9(-1.2,-2) N10(-0.4,-2) N11(0.4,-2) N12(1.2,-2) N13(2,-2) N14(2.8,-2) N15(3.6,-2) N16(4.4,-2) N17(5.2,-2) N18(6,-2) N19(6.8,-2) N20(7.6,-2) P1(-7.6,-2.8) P2(-6.8,-2.8) P3(-6,-2.8) P4(-5.2,-2.8) P5(-4.4,-2.8) P6(-3.6,-2.8) P7(-2.8,-2.8) P8(-2,-2.8) P9(-1.2,-2.8) P10(-0.4,-2.8) P11(0.4,-2.8) P12(1.2,-2.8) P13(2,-2.8) P14(2.8,-2.8) P15(3.6,-2.8) P16(4.4,-2.8) P17(5.2,-2.8) P18(6,-2.8) P19(6.8,-2.8) P20(7.6,-2.8) R1(-7.6,-3.6) R2(-6.8,-3.6) R3(-6,-3.6) R4(-5.2,-3.6) R5(-4.4,-3.6) R6(-3.6,-3.6) R7(-2.8,-3.6) R8(-2,-3.6) R9(-1.2,-3.6) R10(-0.4,-3.6) R11(0.4,-3.6) R12(1.2,-3.6) R13(2,-3.6) R14(2.8,-3.6) R15(3.6,-3.6) R16(4.4,-3.6) R17(5.2,-3.6) R18(6,-3.6) R19(6.8,-3.6) R20(7.6,-3.6) T1(-7.6,-4.4) T2(-6.8,-4.4) T3(-6,-4.4) T4(-5.2,-4.4) T5(-4.4,-4.4) T6(-3.6,-4.4) T7(-2.8,-4.4) T8(-2,-4.4) T9(-1.2,-4.4) T10(-0.4,-4.4) T11(0.4,-4.4) T12(1.2,-4.4) T13(2,-4.4) T14(2.8,-4.4) T15(3.6,-4.4) T16(4.4,-4.4) T17(5.2,-4.4) T18(6,-4.4) T19(6.8,-4.4) T20(7.6,-4.4) U1(-7.6,-5.2) U2(-6.8,-5.2) U3(-6,-5.2) U4(-5.2,-5.2) U5(-4.4,-5.2) U6(-3.6,-5.2) U7(-2.8,-5.2) U8(-2,-5.2) U9(-1.2,-5.2) U10(-0.4,-5.2) U11(0.4,-5.2) U12(1.2,-5.2) U13(2,-5.2) U14(2.8,-5.2) U15(3.6,-5.2) U16(4.4,-5.2) U17(5.2,-5.2) U18(6,-5.2) U19(6.8,-5.2) U20(7.6,-5.2) V1(-7.6,-6) V2(-6.8,-6) V3(-6,-6) V4(-5.2,-6) V5(-4.4,-6) V6(-3.6,-6) V7(-2.8,-6) V8(-2,-6) V9(-1.2,-6) V10(-0.4,-6) V11(0.4,-6) V12(1.2,-6) V13(2,-6) V14(2.8,-6) V15(3.6,-6) V16(4.4,-6) V17(5.2,-6) V18(6,-6) V19(6.8,-6) V20(7.6,-6) W1(-7.6,-6.8) W2(-6.8,-6.8) W3(-6,-6.8) W4(-5.2,-6.8) W5(-4.4,-6.8) W6(-3.6,-6.8) W7(-2.8,-6.8) W8(-2,-6.8) W9(-1.2,-6.8) W10(-0.4,-6.8) W11(0.4,-6.8) W12(1.2,-6.8) W13(2,-6.8) W14(2.8,-6.8) W15(3.6,-6.8) W16(4.4,-6.8) W17(5.2,-6.8) W18(6,-6.8) W19(6.8,-6.8) W20(7.6,-6.8) Y1(-7.6,-7.6) Y2(-6.8,-7.6) Y3(-6,-7.6) Y4(-5.2,-7.6) Y5(-4.4,-7.6) Y6(-3.6,-7.6) Y7(-2.8,-7.6) Y8(-2,-7.6) Y9(-1.2,-7.6) Y10(-0.4,-7.6) Y11(0.4,-7.6) Y12(1.2,-7.6) Y13(2,-7.6) Y14(2.8,-7.6) Y15(3.6,-7.6) Y16(4.4,-7.6) Y17(5.2,-7.6) Y18(6,-7.6) Y19(6.8,-7.6) Y20(7.6,-7.6)
  silkscreen extent -9.02,-8.5 8.5,8.5
CNSMARAL687W375H171 [mil]
  rect 200x19 smd: 1(2.5,0)
  rect 200x95 smd: 2(2.5,172.5) 4(2.5,-172.5)
  rect 200x95 smd far side: 3(2.5,172.5) 5(2.5,-172.5)
  silkscreen extent -113,-235 113,235
D0402 [mm]
  rect 0.51x0.51 smd: 1(-0.41,0) 2(0.41,0)
  silkscreen extent -0.91,-0.5 0.91,0.5
FBGA96 [mm]
  round 0.4 smd: A1(2.504,-0.906) A2(3.304,-0.906) A3(4.104,-0.906) A7(7.304,-0.906) A8(8.104,-0.906) A9(8.904,-0.906) B1(2.504,-1.706) B2(3.304,-1.706) B3(4.104,-1.706) B7(7.304,-1.706) B8(8.104,-1.706) B9(8.904,-1.706) C1(2.504,-2.506) C2(3.304,-2.506) C3(4.104,-2.506) C7(7.304,-2.506) C8(8.104,-2.506) C9(8.904,-2.506) D1(2.504,-3.306) D2(3.304,-3.306) D3(4.104,-3.306) D7(7.304,-3.306) D8(8.104,-3.306) D9(8.904,-3.306) E1(2.504,-4.106) E2(3.304,-4.106) E3(4.104,-4.106) E7(7.304,-4.106) E8(8.104,-4.106) E9(8.904,-4.106) F1(2.504,-4.906) F2(3.304,-4.906) F3(4.104,-4.906) F7(7.304,-4.906) F8(8.104,-4.906) F9(8.904,-4.906) G1(2.504,-5.706) G2(3.304,-5.706) G3(4.104,-5.706) G7(7.304,-5.706) G8(8.104,-5.706) G9(8.904,-5.706) H1(2.504,-6.506) H2(3.304,-6.506) H3(4.104,-6.506) H7(7.304,-6.506) H8(8.104,-6.506) H9(8.904,-6.506) J1(2.504,-7.306) J2(3.304,-7.306) J3(4.104,-7.306) J7(7.304,-7.306) J8(8.104,-7.306) J9(8.904,-7.306) K1(2.504,-8.106) K2(3.304,-8.106) K3(4.104,-8.106) K7(7.304,-8.106) K8(8.104,-8.106) K9(8.904,-8.106) L1(2.504,-8.906) L2(3.304,-8.906) L3(4.104,-8.906) L7(7.304,-8.906) L8(8.104,-8.906) L9(8.904,-8.906) M1(2.504,-9.706) M2(3.304,-9.706) M3(4.104,-9.706) M7(7.304,-9.706) M8(8.104,-9.706) M9(8.904,-9.706) N1(2.504,-10.506) N2(3.304,-10.506) N3(4.104,-10.506) N7(7.304,-10.506) N8(8.104,-10.506) N9(8.904,-10.506) P1(2.504,-11.306) P2(3.304,-11.306) P3(4.104,-11.306) P7(7.304,-11.306) P8(8.104,-11.306) P9(8.904,-11.306) R1(2.504,-12.106) R2(3.304,-12.106) R3(4.104,-12.106) R7(7.304,-12.106) R8(8.104,-12.106) R9(8.904,-12.106) T1(2.504,-12.906) T2(3.304,-12.906) T3(4.104,-12.906) T7(7.304,-12.906) T8(8.104,-12.906) T9(8.904,-12.906)
  silkscreen extent -0.2,-14.01 10.8,0.2
HDR2X12_CEN [mm] "Connector; Header; 12x2 Position"
  rect 1.5x1.5 hole 0.9: 1(0,0)
  round 1.5 hole 0.9: 2(2.54,0) 3(5.08,0) 4(7.62,0) 5(10.16,0) 6(12.7,0) 7(15.24,0) 8(17.78,0) 9(20.32,0) 10(22.86,0) 11(25.4,0) 12(27.94,0) 13(0,2.54) 14(2.54,2.54) 15(5.08,2.54) 16(7.62,2.54) 17(10.16,2.54) 18(12.7,2.54) 19(15.24,2.54) 20(17.78,2.54) 21(20.32,2.54) 22(22.86,2.54) 23(25.4,2.54) 24(27.94,2.54)
  silkscreen extent -1.27,-1.27 29.21,3.81
HR911130C [mil]
  round 66.93 hole 43.31: 11(260,272.62) 12(160,272.62) 13(-160,272.62) 14(-260,272.62)
  rect 60x60 hole 35.83: P1(229.63,-272.62)
  round 60 hole 35.83: P2(179.1,-172.38) P3(125.2,-272.38) P4(79.1,-172.38) P5(25.2,-272.38) P6(-20.9,-172.38) P7(-74.8,-272.38) P8(-120.9,-172.38) P9(-174.8,-272.38) P10(-220.9,-172.38)
  round 85 hole 65: SHIELD0(-315,-42.48) SHIELD1(315,-42.48)
  round 127.95 hole 127.95 unplated: ""(-224.4,77.62) ""(224.4,77.62)
  silkscreen extent -315,-347 315,503
L1008 [mil]
  rect 33.5x98.4 smd: 1(-39.92,0) 2(40.08,0)
  silkscreen extent -31,-39 31,39
LC-0402_C [mm]
  rect 0.6x0.65 smd mask+0.051: 1(-0.425,0) 2(0.425,0)
  silkscreen extent -0.97,-0.58 0.98,0.58, body extent -0.48,-0.3 0.52,0.3, height 0.2
LC-0402_R [mm]
  rect 0.6x0.65 smd mask+0.051: 1(-0.425,0) 2(0.425,0)
  silkscreen extent -0.97,-0.58 0.97,0.58, body extent -0.57,-0.27 0.57,0.28, height 0.41
LC-0603_L [mm]
  oval 0.93x0.98 smd: 1(-0.77,0) 2(0.77,0)
  silkscreen extent -1.53,-0.79 1.54,0.79, body extent -0.8,-0.41 0.8,0.41, height 0.46
LC-0805_C [mm]
  rect 1.16x1.47 smd: 1(-0.89,0) 2(0.89,0)
  silkscreen extent -1.77,-1.04 1.77,1.04
LC-QFN-32_5x5x05P [mm]
  rect 3.5x3.5 smd paste-1.75 mask+0.051: 0(0,0)
  oval 0.28x0.9 smd mask+0.051: 1(-1.75,-2.55) 2(-1.25,-2.55) 3(-0.75,-2.55) 4(-0.25,-2.55) 5(0.25,-2.55) 6(0.75,-2.55) 7(1.25,-2.55) 8(1.75,-2.55) 17(1.75,2.55) 18(1.25,2.55) 19(0.75,2.55) 20(0.25,2.55) 21(-0.25,2.55) 22(-0.75,2.55) 23(-1.25,2.55) 24(-1.75,2.55)
  oval 0.9x0.28 smd mask+0.051: 9(2.55,-1.75) 10(2.55,-1.25) 11(2.55,-0.75) 12(2.55,-0.25) 13(2.55,0.25) 14(2.55,0.75) 15(2.55,1.25) 16(2.55,1.75) 25(-2.55,1.75) 26(-2.55,1.25) 27(-2.55,0.75) 28(-2.55,0.25) 29(-2.55,-0.25) 30(-2.55,-0.75) 31(-2.55,-1.25) 32(-2.55,-1.75)
  silkscreen extent -2.7,-3.35 2.7,2.7
LC-QFN-48_6x6x04P [mm]
  rect 4.2x4.2 smd mask+0.051: 0(0,0)
  oval 0.22x1 smd mask+0.051: 1(-2.2,-2.9) 2(-1.8,-2.9) 3(-1.4,-2.9) 4(-1,-2.9) 5(-0.6,-2.9) 6(-0.2,-2.9) 7(0.2,-2.9) 8(0.6,-2.9) 9(1,-2.9) 10(1.4,-2.9) 11(1.8,-2.9) 12(2.2,-2.9) 25(2.2,2.9) 26(1.8,2.9) 27(1.4,2.9) 28(1,2.9) 29(0.6,2.9) 30(0.2,2.9) 31(-0.2,2.9) 32(-0.6,2.9) 33(-1,2.9) 34(-1.4,2.9) 35(-1.8,2.9) 36(-2.2,2.9)
  oval 1x0.22 smd mask+0.051: 13(2.9,-2.2) 14(2.9,-1.8) 15(2.9,-1.4) 16(2.9,-1) 17(2.9,-0.6) 18(2.9,-0.2) 19(2.9,0.2) 20(2.9,0.6) 21(2.9,1) 22(2.9,1.4) 23(2.9,1.8) 24(2.9,2.2) 37(-2.9,2.2) 38(-2.9,1.8) 39(-2.9,1.4) 40(-2.9,1) 41(-2.9,0.6) 42(-2.9,0.2) 43(-2.9,-0.2) 44(-2.9,-0.6) 45(-2.9,-1) 46(-2.9,-1.4) 47(-2.9,-1.8) 48(-2.9,-2.2)
  silkscreen extent -3.2,-3.85 3.2,3.2
LC-SMD-5032_2P [mil]
  rect 66.92x94.48 smd: 1(-77.18,0.02) 2(77.18,-0.02)
  silkscreen extent -99,-66 98,61
"micro usb" [mm]
  rect 0.4x2 smd: 1(1.145,0.066) 2(1.795,0.066) 3(2.445,0.066) 4(3.095,0.066) 5(3.745,0.066)
  round 1.3 hole 0.7: 6(4.87,0.074) 9(0.02,0.074)
  oval 1.3x2.199 hole 0.7 slot 1.5 at 90 deg: 7(6.045,-2.597) 8(-1.155,-2.597)
  silkscreen extent -1.55,-5.33 6.45,0.42
MLP8 [mil]
  rect 43.3x19.7 smd: 1(-138.85,75) 2(-138.85,25) 3(-138.85,-25) 4(-138.85,-75) 5(176.15,-75) 6(176.15,-25) 7(176.15,25) 8(176.15,75)
  silkscreen extent -165,-118 176,118
NMOS [mil]
  rect 36x36 smd: 1(80,-39) 2(80,36)
  rect 50x36 smd: 3(0,-1)
  silkscreen extent -5,-59 85,56
OSC-SMD_4P-L3.2-W2.5-BL [mm]
  rect 0.5x0.5 smd: 1(-2.454,-1.371)
  rect 1.4x1.15 smd: 2(-0.254,-1.371) 3(-0.254,0.229) 4(-2.454,0.229)
  Top Layer region: -3.154,-0.796 -2.116,-0.796 -1.754,-1.175 -1.754,-1.946 -3.154,-1.946
  silkscreen extent -3.45,-2.92 0.75,1.13
TCM811TERCTR [mil]
  rect 12x30 smd: 1(-36,-41.3) 2(39,-41.3) 3(39,41.3) 4(-36,41.3)
  silkscreen extent -56,-81 56,66
TF [mm]
  rect 1.4x1.6 smd: 0(-4.55,6.85)
  rect 1.6x0.7 smd: 1(-5.05,2.25) 2(-5.05,1.15) 3(-5.05,0.05) 4(-5.05,-1.05) 5(-5.05,-2.15) 6(-5.05,-3.25) 7(-5.05,-4.35) 8(-5.05,-5.45) 9(-5.05,-6.55)
  rect 1.4x1.2 smd: 10(-4.55,-7.75)
  rect 2.2x1.2 smd: 11(5.05,-7.75) 12(5.05,7.75)
  silkscreen extent -4.06,-7.29 9.47,7.15
TLV62130RGT [mil]
  oval 11x33.5 smd: 1(-29.5,-58.6) 2(-9.8,-58.6) 3(9.8,-58.6) 4(29.5,-58.6) 9(29.5,57.6) 10(9.8,57.6) 11(-9.8,57.6) 12(-29.5,57.6)
  oval 33.5x11 smd: 5(58.1,-30) 6(58.1,-10.3) 7(58.1,9.3) 8(58.1,29) 13(-58.1,29) 14(-58.1,9.3) 15(-58.1,-10.3) 16(-58.1,-30)
  rect 66.9x66.9 smd: 20(0,-0.5)
  silkscreen extent -59,-94 59,59
TPS7A8101 [mm]
  rect 1.5x2.8 smd: 0(0,0)
  rect 0.6x0.3 smd: 1(-1.5,0.975) 2(-1.5,0.325) 3(-1.5,-0.325) 4(-1.5,-0.975) 5(1.5,-0.975) 6(1.5,-0.325) 7(1.5,0.325) 8(1.5,0.975)
  silkscreen extent -1.6,-1.6 1.6,1.6, body extent -1.5,-1.5 1.5,1.5, height 0.6
TPS2051BDBVR [mm]
  rect 1x0.55 smd: 1(1.087,-0.95) 2(1.087,0) 3(1.087,0.95) 4(-1.913,0.95) 5(-1.913,-0.95)
  silkscreen extent -1.31,-1.78 1.24,1.55
TSML150W160H160 [mil]
  rect 30x65 smd: 1(-50,62.51) 2(0,62.51) 3(50,62.51) 4(50,-62.49) 5(0,-62.49) 6(-50,-62.49)
  silkscreen extent -130,-110 90,110, body extent -90,-110 90,110, height 150
TXS02612RTWR [mil]
  rect 33.4x11.8 smd: 1(-79.75,52.7) 2(-79.75,33) 3(-79.75,13.3) 4(-79.75,-6.4) 5(-79.75,-26) 6(-79.75,-45.7) 13(73.75,-45.7) 14(73.75,-26) 15(73.75,-6.4) 16(73.75,13.3) 17(73.75,33) 18(73.75,52.7)
  rect 11.8x33.4 smd: 7(-52.16,-73.3) 8(-32.56,-73.3) 9(-12.85,-73.3) 10(6.84,-73.3) 11(26.55,-73.3) 12(46.25,-73.3) 19(46.25,80.3) 20(26.55,80.3) 21(6.84,80.3) 22(-12.85,80.3) 23(-32.56,80.3) 24(-52.16,80.3)
  rect 98.4x98.4 smd: 25(-2.75,3.7)
  silkscreen extent -110,-81 82,88
W25Q256 [mm]
  rect 0.5x1 smd: 1(-1.92,-3.8) 2(-0.64,-3.8) 3(0.64,-3.8) 4(1.92,-3.8) 5(1.92,3.8) 6(0.64,3.8) 7(-0.64,3.8) 8(-1.92,3.8)
  rect 4.3x3.4 smd: 9(0,0)
  silkscreen extent -3,-4.7 3,4
开关 [mm]
  rect 1.2x2 smd: 1(-2.321,-0.024) 2(2.179,-0.024)
  silkscreen extent -2.07,-1.52 1.93,1.48

## Part data
C1: library part CAP, "Capacitor"
C2 C3 C4 C5 C6 C7 C8 C9 C10 C11 C12 C13 C17 C18 C19 C20 C21 C22 C23 C24 C25 C26 C27 C28 C33 C34 C35 C36 C37 C38 C39 C41 C42 C43 C44 C45 C46 C49 C50 C51 C52 C53 C54 C55 C56 C57 C61 C62 C67 C68 C69 C70 C71 C72 C73 C74 C75 C76 C77 C78 C80 C81 C82 C83 C84 C85 C86 C87 C89 C90 C91 C92 C93 C94 C95 C96 C98 C99 C100 C101 C102 C103 C104 C105 C106 C107 C108: library part CAP_3, "Capacitor"
C14 C15 C16 C29 C30 C31 C32 C40 C47 C48 C117 C118 C122 C123 C145 C146 C150 C151 C152 C162 C165 C166 C168 C169 C170 C171 C172 C173 C174 C175 C176 C177 CP1 CP3: library part CAP_1, "Capacitor"
C58 C59 C60 C63 C109 C110 C111 C112 C113 C114 C115 C116 C119 C120 C121 C124 C125 C126 C127 C128 C129 C130 C131 C132 C133 C134 C135 C136 C137 C138 C139 C140 C141 C142 C143 C144 CP2: library part CAP_2, "Capacitor"
DONE USR_LED: library part LED0, "Typical INFRARED GaAs LED", LatestRevisionDate=08-Jul-2005, LatestRevisionNote="Mech Layer 1 removed.", PackageDescription="LED; 2 Leads", PackageReference=LED-0, Published=8-Jun-2000, Publisher="Altium Limited"
L1 L2 L3 L4 L6: library part INDUCTANCE_1, "Inductance"
L5 L7 L8 L9 LP1: library part INDUCTANCE, "Inductance"
LG1: BOM_Manufacturer=HANRUN, BOM_Manufacturer Part=HR911130C, BOM_Supplier=LCSC, BOM_Supplier Part=C50933, Contributor=LCSC, nameAlias=Value, spicePre=L, spiceSymbolName=HR911130C
P2: "Header, 12-Pin, Dual row", LatestRevisionDate=17-Jul-2002, LatestRevisionNote="Re-released for DXP Platform.", Publisher="Altium Limited"
Q1 Q2: PSpiceTemplate="X^@REFDES %d %g %s @MODEL"
R1 R2 R3 R4 R5 R6 R7 R8 R9 R10 R11 R12 R13 R14 R15 R16 R17 R18 R19 R20 R21 R22 R24 R25 R26 R27 R28 R29 R30 R31 R32 R33 R34 R35 R36 R37 R38 R39 R40 R41 R42 R43 R44 R45 R46 R47 R48 R49 R50 R51 R52 R53 R54 R55 R56 R57 R58 R59 R60 R61 R62 R63 R64 R65 R66 R67 R68 R69 R70 R71 R72: library part RES, "Resistor"
R73 R74 R75 RP1 RP2 RX4 RX5 RX6 RX7 RX8 RX10 RX13 RX14 RX15 RX22: library part RES_1, "Resistor"
RESET USR_BTN: "Switch", LatestRevisionDate=17-Jul-2002, LatestRevisionNote="Re-released for DXP Platform.", PackageDescription="Switch; 2 Leads", PackageReference=SPST-2, Published=24-Mar-1999, Publisher="Altium Limited"
U2: library part DDR3
U14: library part N25Q12-F8, "Serial Flash Memory, 16Mbit, Low Voltage, 50MHz SPI Bus Interface", Manufacturer=Spansion
X1 X3: library part XTAL-2, "Crystal"
X2 X4: library part XTAL-4, "Oscillator"

## Via types
v1: diameter 17.72, hole 7.87, Top Layer to Bottom Layer, tented both sides, 194 vias
v2: diameter 16, hole 10, Top Layer to Bottom Layer, 118 vias
v3: diameter 19.68, hole 11.81, Top Layer to Bottom Layer, 16 vias

## Nets (pads, with @x,y where several pads share a name; then routed paths per layer and width w, separated by ;. In a path a pad name is that pad's centre, name@x,y a point inside that pad or via, vN(x,y) a via of type N, cw(c..) or ccw(c..) an arc to the next point about the centre after c; other vN are vias at no path point)
1P3_TX: C58.1 C59.2 C60.1 C63.2 L5.1 L7.1 L8.1 L9.1 U5.A7 U5.A8 U5.A9 U5.A10
AD9361_CLKOUT: U1.W18 U5.J6 | length 617.5
  Top Layer w5: v1@3510,2366 3512,2368 3512,2449 3534,2471 3557,2471 3568.11,2482.11 3568.11,2501.42 U1.W18@3583.59,2516.9 ; U5.J6@3667.49,2084.02 3683.24,2068.27 v1(3683.37,2068.27)
  Bottom Layer w5: v1(3512,2363) 3514.43,2360.57 3523.71,2360.57 3582,2302.27 3582,2120 3610.49,2091.51 3660,2091.51 3683.24,2068.27 v1(3683.37,2068.27)
AD9361_RST: RX4.1 U1.R19 U5.K5 | length 626.6
  Top Layer w5: v1(3685.36,2376.92) 3688.8,2376.92 3696.08,2369.64 3742.36,2369.64 3751.36,2378.64 3751.36,2412.36 3740.36,2423.36 3727.64,2423.36 3723.1,2418.82 3707.18,2418.82 3693.57,2432.43 3693.57,2469.39 U1.R19@3709.05,2484.87 ; U5.K5@3698.99,2052.53 v1(3714.74,2036.78)
  Layer 1 w5: v1(3685.36,2376.92) 3682.43,2373.99 3680,2373.99 3680,2281 3666.72,2267.72 3666.72,2115.28 3699.38,2082.62 3699.38,2052.14 v1(3714.74,2036.78)
ADVDD10: C124.1 C125.1 C126.1 C127.2 C128.2 C130.2 C131.2 L6.2 U3.3 U3.9 U3.28 U3.36 U3.40
CB: *.6 R58.1 U14.6
CTRL_IN0: U5.C5 | length 22.3
  Top Layer w5: v1(3462.76,2036.78) U5.C5@3478.51,2052.53
CTRL_IN1: U5.C6 | length 22.3
  Top Layer w5: v1(3462.76,2068.27) U5.C6@3478.51,2084.02
CTRL_IN2: U5.D6 | length 22.3
  Top Layer w5: v1(3494.26,2068.27) U5.D6@3510.01,2084.02
CTRL_IN3: U5.D5 | length 22.3
  Top Layer w5: v1(3494.26,2036.78) U5.D5@3510.01,2052.53
CTRL_OUT0: U1.P14 U5.D4 | length 22.3
  Top Layer w5: v1(3494.26,2005.28) U5.D4@3510.01,2021.03
CTRL_OUT1: U1.R14 U5.E4 | length 22.3
  Top Layer w5: v1(3525.76,2005.28) U5.E4@3541.51,2021.03
CTRL_OUT2: U1.T14 U5.E5 | length 70.3
  Top Layer w5: v1(3525.76,2036.78) U5.E5@3541.51,2052.53 ; v1@3662.07,2627.05 U1.T14@3677.55,2642.53
  Bottom Layer w5: v1(3662.07,2626.87) 3662.07,2628.29 3679.51,2645.73
CTRL_OUT3: U1.T15 U5.E6 | length 88.1
  Top Layer w5: v1(3525.76,2068.27) U5.E6@3541.51,2084.02 ; v1@3662.07,2595.56 U1.T15@3677.55,2611.04
  Bottom Layer w5: v1(3662.07,2595.38) 3662.07,2597.88 3678.89,2614.7 3678.89,2632.38
CTRL_OUT4: U1.U14 U5.F6 | length 874.6
  Top Layer w5: v1(3557.25,2068.27) U5.F6@3573,2084.02 ; v1@3630.58,2626.87 U1.U14@3646.06,2642.35
  Layer 1 w4: 3584.75,2613.75 3588,2610.5 3614.38,2610.5 v1(3630.58,2626.7)
  Layer 1 w5: v1@3557.49,2070.51 3528,2100 3486,2100 3380,2206 3380,2472 3436,2528 3464,2528 3489,2553 3489,2575 3506,2592 3506,2593 3526.75,2613.75 3584.75,2613.75
CTRL_OUT5: U1.U15 U5.F5 | length 779.3
  Top Layer w5: v1(3557.25,2036.78) U5.F5@3573,2052.53 ; v1@3630.58,2595.38 U1.U15@3646.06,2610.86
  Layer 1 w5: v1(3557.25,2036.78) 3579,2058.53 3579,2199 3568.38,2209.62 3545.38,2209.62 3542,2213 3542,2301.37 3537.07,2306.3 3537.07,2374.93 3502,2410 3502,2575 3529,2602 3612.15,2602 3617.15,2597 3628.78,2597 v1(3630.58,2595.21)